# Altium PCB Sandshark 3D R1.1.PcbDoc (part 3 of 3)
Units mil, origin at the board's own origin, x right, y up, seen from the top; angles counter-clockwise.
Board outline 4143.89 x 2810.03 mil, 5 copper layers (Top Layer, Mid-Layer 1, Groun Plane, Power Plane, Bottom Layer), stack 75.73 mil thick; 280 components, 177 nets, 885 pads, 519 vias.
Unrouted connection lines stored in the file: 19.
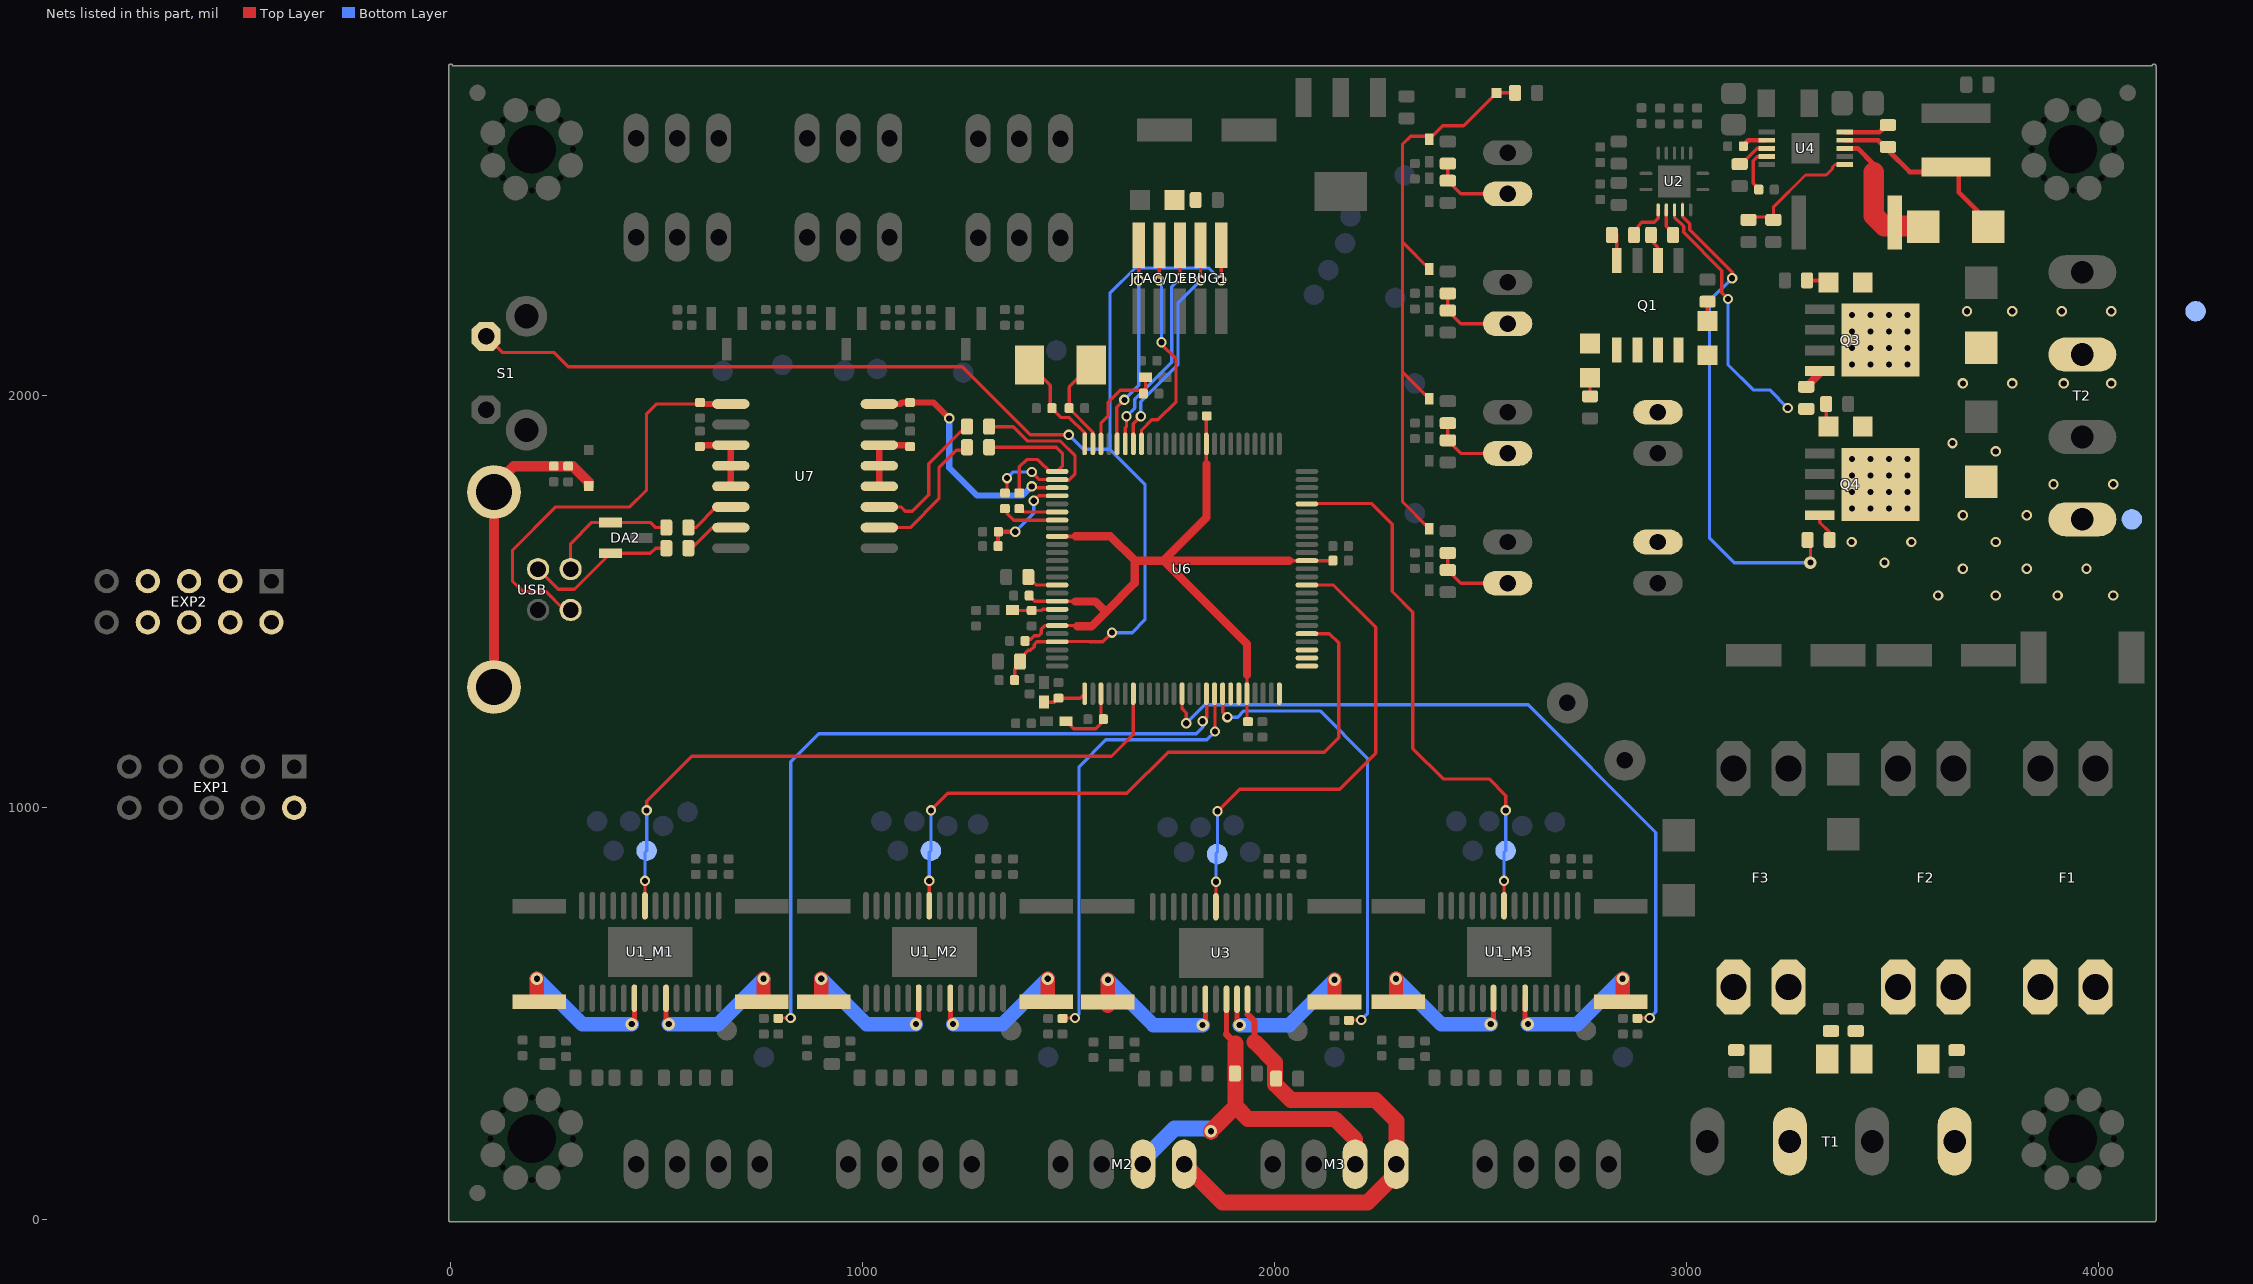
[diagram p5: the nets of this part, all layers, seen from the top]

## Via types
v1: diameter 25, hole 15, Top Layer to Bottom Layer, 288 vias
v2: diameter 30, hole 15, Top Layer to Bottom Layer, tented both sides, 72 vias
v3: diameter 19.68, hole 7.87, Top Layer to Bottom Layer, 64 vias
v4: diameter 25, hole 15, Top Layer to Bottom Layer, tented both sides, 51 vias
v5: diameter 30, hole 15, Top Layer to Bottom Layer, tented bottom, 32 vias
v6: diameter 30, hole 15, Top Layer to Bottom Layer, 10 vias
v7: diameter 50, hole 30, Top Layer to Bottom Layer, 2 vias

## Nets (pads, with @x,y where several pads share a name; then routed paths per layer and width w, separated by ;. In a path a pad name is that pad's centre, name@x,y a point inside that pad or via, vN(x,y) a via of type N, cw(c..) or ccw(c..) an arc to the next point about the centre after c; other vN are vias at no path point) (continued)
NetC23_1: C23.1 M2.1 M3.1 U3.10 | length 1276.3
  Top Layer w12: 1933.98,498.66 U3.10@1933.98,535.43
  Top Layer w15: 1933.98,498.66 1951,481.64 1951,431.64
  Top Layer w39: M2.1@1780,135 1873.5,41.5 2225,41.5 2295,111.5 M3.1@2295,135 2295,240 2244,291 2039,291 2001,329 2001,381.64 1951,431.64
NetC26_1: C26.1 M2.2 M3.2 U3.8 | length 946.9
  Top Layer w12: 1882.8,449.84 U3.8@1882.8,535.43
  Top Layer w18: 1882.8,449.84 1905,427.64
  Top Layer w39: v2(1845,215) 1905,275 ; 1905,427.64 1905,275 ; M3.2@2195,135 2195,195 2145,245 1935,245 1905,275
  Bottom Layer w39: M2.2@1680,135 1680,144.9 1756.6,221.5 1838.5,221.5 v2(1845,215)
NetC28_1: C28.1 U4.10 | length 93.7
  Top Layer w12: U4.10@3382.8,2639.8 3383.1,2639.5 3467.5,2639.5 C28.1@3473.77,2645.77
NetC28_2: C28.2 D15.C L1.1 U4.9 | length 475.6
  Top Layer w12: U4.9@3382.8,2620.11 3464.12,2620.11 3492,2592.23 3540.97,2543.26 3660,2543.26 3660,2493.74 D15.C@3742.74,2411
NetC32_1: C32.1 U4.4 | length 112
  Top Layer w8: C32.1@3176.3,2501 3161.52,2515.78 3161.52,2570.29 3171.97,2580.74 U4.4@3193.83,2580.74
NetC36_2: C36.2 U6.25 X1.1 | length 258.9
  Top Layer w8: X1.1@1405,2075 1455,2025 1455,1974 C36.2@1459,1970 1482,1947 1501.79,1947 1538.78,1910.01 U6.25@1538.78,1883.15
NetC37_2: C37.2 U6.24 X1.2 | length 237.9
  Top Layer w8: X1.2@1554.61,2075 1501,2021.39 C37.2@1501,1970 1501,1969 1558.46,1911.54 U6.24@1558.46,1883.15
NetC38_1: C38.1 R35.2 U6.29 | length 231.7
  Top Layer w8: v1(1415,1745) 1427.17,1757.17 U6.29@1471.85,1757.17
  Top Layer w10: C38.1@1328.7,1635 R35.2@1328.7,1669.7 ; R35.2@1329,1670 v1(1370,1670)
  Top Layer w15: R35.2@1328.7,1669.7 R35.2@1329,1670
  Bottom Layer w8: v1(1370,1670) 1415,1715 v1(1415,1745)
NetC40_2: C40.2 FB1.1 U6.53 | length 174.6
  Top Layer w8: FB1.1@1493.62,1210 1511.62,1192 1566,1192 1584,1210 1578.15,1215.85 U6.53@1578.15,1276.85
NetC42_2: C42.2 C43.2 C44.2 C45.2 C46.2 U6.10 U6.34 U6.42 U6.45 U6.71 U6.89 | length 2150.5
  Top Layer w8: C43.2@1394,1409 1407.79,1409 1416.62,1417.83 1427.83,1417.83 1433,1423 1433,1433 1442.2,1442.2 U6.45@1471.85,1442.2 1518.8,1442.2 1520.5,1440.5 ; C44.2@1404,1515 1417.74,1501.26 U6.42@1471.85,1501.26 1514.74,1501.26 ; 1834.5,1834.5 1834.06,1834.94 U6.10@1834.06,1883.15 1834.06,1950.06 C42.2@1835,1951 ; 1932.48,1322.48 U6.71@1932.48,1276.85 1932.48,1211.52 C45.2@1935,1209 ; 2035,1599.68 U6.89@2078.15,1599.68 C46.2@2141,1599.68
  Top Layer w10: U6.34@1471.85,1658.74 1516.26,1658.74
  Top Layer w12: 1660,1599.68 1660.32,1599.68 ; 1729.68,1599.68 1730.32,1599.68
  Top Layer w20: 1515.5,1500.5 1564.5,1500.5 1590,1475 ; 1516.26,1658.74 1601.26,1658.74 1660.32,1599.68 1729.68,1599.68 1834.5,1704.5 1834.5,1834.5 ; 1520.5,1440.5 1555.5,1440.5 1590,1475 ; 1660,1599.68 1660,1545 1590,1475 ; 1932.48,1322.48 1932.48,1397.52 1730.32,1599.68 2035,1599.68
NetC51_2: C51.2 FB2.1 U6.51 | length 107.3
  Top Layer w8: FB2.1@1440,1256.38 1465.38,1256.38 C51.2@1475,1266 1527.93,1266 U6.51@1538.78,1276.85
NetC54_2: C54.2 FB3.2 U6.43 | length 108.3
  Top Layer w8: FB3.2@1364.62,1479 C54.2@1410,1479 1434,1479 1436.57,1481.57 U6.43@1471.85,1481.57
NetC56_2: C56.2 FB4.2 U6.23 | length 254.6
  Top Layer w8: U6.23@1578.15,1883.15 1578.15,1933.15 1596,1951 1596,1980.77 1595.88,1980.88 1595.88,1984.12 1625.27,2013.5 1683.26,2013.5 C56.2@1686.38,2010.38 ; C56.2@1681,2005 C56.2@1686.38,2010.38 ; FB4.2@1686.38,2045 C56.2@1686.38,2010.38
NetC57_1: C57.1 U7.12 U7.13 U7.14 | length 176.4
  Top Layer w8: C57.1@1111.3,1880 C57.1@1115,1876.3
  Top Layer w15: U7.12@1040.12,1780 U7.13@1040.12,1830 U7.14@1040.12,1880 C57.1@1111.3,1880
NetC59_1: C59.1 U7.1 USB.1 | length 1015.3
  Top Layer w8: USB.1@276,1480 231,1525 175,1525 150,1550 150,1625 255,1730 435,1730 475,1770 475,1955 500,1980 C59.1@608.7,1980
  Top Layer w15: C59.1@608.7,1980 U7.1@679.88,1980
NetC60_1: C60.1 U7.3 U7.4 U7.5 | length 176.4
  Top Layer w8: C60.1@605,1876.3 C60.1@608.7,1880
  Top Layer w15: C60.1@608.7,1880 U7.3@679.88,1880 U7.4@679.88,1830 U7.5@679.88,1780
NetC61_2: C61.2 D22.A R42.2 USB.P$1 USB.P$2 | length 769.4
  Top Layer w25: USB.P$2@90,1293 105,1308 105,1781.22 152.78,1829 C61.2@250,1829 R42.2@285,1829 296,1829 335,1790 D22.A@335,1781
NetC67_1: C67.1 C69.1 FB5.1 FB6.1 T1.3
NetC68_1: C68.1 F2.1 FB5.2
NetC70_1: C70.1 F3.1 FB6.2
NetD5_A: D5.A R7.1 | length 41.9
  Top Layer w8: D5.A@3050,2186.34 R7.1@3050,2228.23
NetD5_C: D5.C FAN-1.2 Q1.7
NetD6_A: D6.A R10.1 | length 35.1
  Top Layer w8: R10.1@2765.01,1998.54 D6.A@2765,2033.66
NetD6_C: D6.C FAN-2.2 Q1.5
NetD7_A: D7.A D8.C Q3.5 T2.3 TP12.1
  other v1: 3670,2030 3790,2030 3915,2030 4030,2030 3680,2205 3790,2205 3910,2205 4030,2205
  other v5: 3400.88,2076.1 3445.88,2076.1 3490.88,2076.1 3535.88,2076.1 3400.88,2116.1 3445.88,2116.1 3490.88,2116.1 3535.88,2116.1 3400.88,2156.1 3445.88,2156.1 3490.88,2156.1 3535.88,2156.1 3400.88,2196.1 3445.88,2196.1 3490.88,2196.1 3535.88,2196.1
NetD8_A: D8.A R13.1 | length 46.9
  Top Layer w10: R13.1@3291.77,2280 D8.A@3338.67,2280
NetD9_A: D9.A R16.1 | length 57.3
  Top Layer w8: R16.1@3338.23,1980 3338.23,1930.43 D9.A@3343.66,1925
NetD9_C: D9.C D10.A Q4.5 T2.1 TP14.1
  other v1: 3610,1515 3750,1515 3900,1515 4035,1515 3670,1580 3825,1580 3970,1580 3480,1595 3400,1645 3545,1645 3750,1645 3670,1710 3825,1710 3890,1785 4035,1785 3750,1865 3645,1885
  other v5: 3400.88,1726.1 3445.88,1726.1 3490.88,1726.1 3535.88,1726.1 3400.88,1766.1 3445.88,1766.1 3490.88,1766.1 3535.88,1766.1 3400.88,1806.1 3445.88,1806.1 3490.88,1806.1 3535.88,1806.1 3400.88,1846.1 3445.88,1846.1 3490.88,1846.1 3535.88,1846.1
NetD15_A: D15.A R26.2 U4.8 | length 341.9
  Top Layer w12: U4.8@3382.8,2600.43 3414.67,2600.43 3453.88,2561.22 3453.88,2542
  Top Layer w50: 3453.88,2542 3453.88,2437.26 3479.14,2412 3494.14,2412 D15.A@3574,2412
NetD18_C: D18.C D23_U_TR1.C D23_U_TR2.C D23_U_TR3.C D23_U_TR4.C R29.1 | length 1470.8
  Top Layer w8: 2311.28,2056.28 D23_U_TR4.C@2375,1992.56 ; 2311.28,2371.28 D23_U_TR2.C@2375,2307.56 ; D23_U_TR3.C@2375,1677.56 2310,1742.56 2310,2610 2330,2630 2367.56,2630 D23_U_TR1.C@2375,2622.56 2407.44,2655 2458.31,2655 D18.C@2538.31,2735 R29.1@2583.23,2735
NetF1_1: F1.1 T1.1
NetLED1_A: LED1.A R30.1
NetP2_U_TR1_1: P2_U_TR1.1 R43_U_TR1.1 R44_U_TR1.2 | length 199.6
  Top Layer w8: R44_U_TR1.2@2420,2563.23 R43_U_TR1.1@2420,2521.77 2451.77,2490 P2_U_TR1.1@2565,2490
NetP2_U_TR2_1: P2_U_TR2.1 R43_U_TR2.1 R44_U_TR2.2 | length 186.4
  Top Layer w8: R44_U_TR2.2@2420,2235 R43_U_TR2.1@2420,2206.77 2451.77,2175 P2_U_TR2.1@2565,2175
NetP2_U_TR3_1: P2_U_TR3.1 R43_U_TR3.1 R44_U_TR3.2 | length 199.6
  Top Layer w8: R44_U_TR3.2@2420,1618.23 R43_U_TR3.1@2420,1576.77 2451.77,1545 P2_U_TR3.1@2565,1545
NetP2_U_TR4_1: P2_U_TR4.1 R43_U_TR4.1 R44_U_TR4.2 | length 199.6
  Top Layer w8: R44_U_TR4.2@2420,1933.23 R43_U_TR4.1@2420,1891.77 2451.77,1860 P2_U_TR4.1@2565,1860
NetQ1_2: Q1.2 R8.2 | length 71.6
  Top Layer w8: R8.2@2918.23,2395 2918.23,2371.77 2930,2360 Q1.2@2930,2328.27
NetQ1_4: Q1.4 R11.2 | length 65
  Top Layer w8: Q1.4@2830,2328.27 R11.2@2830,2393.22
NetQ3_4: Q3.4 R14.2 | length 51.7
  Top Layer w20: R14.2@3290,2021.77 3322.64,2054.42 Q3.4@3322.64,2060
NetQ4_4: Q4.4 R17.2 | length 70
  Top Layer w8: Q4.4@3322.64,1710 3322.64,1692.36 3346.77,1668.23 R17.2@3346.77,1650
NetR5_M1_2: R5_M1.2 U1_M1.9 | length 397.2
  Top Layer w12: U1_M1.9@522.64,537.8 522.64,481.61 v2(529.25,475)
  Top Layer w35: R5_M1.2@759.25,528.86 v2(759.25,585)
  Bottom Layer w35: v2(529.25,475) 649.25,475 v2(759.25,585)
NetR5_M2_2: R5_M2.2 U1_M2.9 | length 397.2
  Top Layer w12: U1_M2.9@1212.64,537.8 1212.64,481.61 v2(1219.25,475)
  Top Layer w35: R5_M2.2@1449.25,528.86 v2(1449.25,585)
  Bottom Layer w35: v2(1219.25,475) 1339.25,475 v2(1449.25,585)
NetR5_M3_2: R5_M3.2 U1_M3.9 | length 397.2
  Top Layer w12: U1_M3.9@2607.64,537.8 2607.64,481.61 v2(2614.25,475)
  Top Layer w35: R5_M3.2@2844.25,528.86 v2(2844.25,585)
  Bottom Layer w35: v2(2614.25,475) 2734.25,475 v2(2844.25,585)
NetR6_M1_2: R6_M1.2 U1_M1.6 | length 397.2
  Top Layer w12: v2(439.25,475) 445.87,481.61 U1_M1.6@445.87,537.8
  Top Layer w35: R6_M1.2@209.25,528.86 v2(209.25,585)
  Bottom Layer w35: v2(209.25,585) 319.25,475 v2(439.25,475)
NetR6_M2_2: R6_M2.2 U1_M2.6 | length 397.2
  Top Layer w12: v2(1129.25,475) 1135.87,481.61 U1_M2.6@1135.87,537.8
  Top Layer w35: R6_M2.2@899.25,528.86 v2(899.25,585)
  Bottom Layer w35: v2(899.25,585) 1009.25,475 v2(1129.25,475)
NetR6_M3_2: R6_M3.2 U1_M3.6 | length 397.2
  Top Layer w12: v2(2524.25,475) 2530.87,481.61 U1_M3.6@2530.87,537.8
  Top Layer w35: R6_M3.2@2294.25,528.86 v2(2294.25,585)
  Bottom Layer w35: v2(2294.25,585) 2404.25,475 v2(2524.25,475)
NetR8_1: R8.1 U2.12 | length 62.9
  Top Layer w8: U2.12@2950.32,2451.1 2950.32,2411.45 R8.1@2966.77,2395
NetR11_1: R11.1 U2.13 | length 93.9
  Top Layer w8: R11.1@2881.77,2395 2881.77,2411.77 2890.68,2420.68 2920.68,2420.68 2930.63,2430.63 U2.13@2930.63,2451.1
NetR14_1: R14.1 U2.11 | length 618.4
  Top Layer w8: U2.11@2970,2451.1 2970,2433.16 2992.34,2410.82 2992.34,2396.45 3085,2303.79 3085,2250 v1(3100,2235)
  Bottom Layer w8: v1(3100,2235) 3100,2075.03 3161.03,2014 3201,2014 v1(3245,1970)
NetR17_1: R17.1 U2.10 | length 1211.4
  Top Layer w8: U2.10@2989.69,2466.1 2989.69,2434.69 3007.34,2417.04 3007.34,2402.66 3110,2300 v4(3110,2285) ; R17.1@3293.23,1650 3300,1643.23 v2(3300,1595)
  Bottom Layer w8: v4(3110,2285) 3055,2230 3055,1655 3115,1595 v2(3300,1595)
NetR21_2: R21.2 U3.9 | length 388.7
  Top Layer w12: U3.9@1908.39,535.43 1908.39,479.25 v2(1915,472.64)
  Top Layer w35: R21.2@2145,535 v2(2145,582.64)
  Bottom Layer w35: v2(1915,472.64) 2035,472.64 v2(2145,582.64)
NetR22_2: R22.2 U3.6 | length 404.1
  Top Layer w12: v2(1825,472.64) 1831.61,479.25 U3.6@1831.61,535.43
  Top Layer w35: R22.2@1595,519.69 v2(1595,582.64)
  Bottom Layer w35: v2(1595,582.64) 1705,472.64 v2(1825,472.64)
NetR23_1: R23.1 U4.2 | length 56.9
  Top Layer w12: R23.1@3140.68,2611.05 3149.73,2620.11 U4.2@3193.83,2620.11
NetR25_1: R25.1 U4.3 | length 69.1
  Top Layer w8: R25.1@3138.14,2568.14 3170.43,2600.43 U4.3@3193.83,2600.43
NetR27_2: R27.2 R28.1 U4.6 | length 290.4
  Top Layer w7: R28.1@3146.36,2433.6 R27.2@3202.45,2433.6 ; R27.2@3210,2441.15 3210,2457.67 3287.89,2535.56 3338.25,2535.56 3353.18,2550.49 3353.18,2554.18 3360.06,2561.06 U4.6@3382.8,2561.06
NetR31_2: R31.2 U6.31 | length 92.8
  Top Layer w8: R31.2@1380,1720 1390,1720 1392.2,1717.8 U6.31@1471.85,1717.8
NetR32_2: R32.2 U6.32 | length 139.8
  Top Layer w8: R32.2@1350,1726 1350,1715 1366.89,1698.11 U6.32@1471.85,1698.11
NetR34_2: R34.2 U6.40 | length 78.1
  Top Layer w8: R34.2@1401.77,1560 1421.15,1540.63 U6.40@1471.85,1540.63
R_N: DA2.1 R38.2 USB.2 | length 317.7
  Top Layer w8: USB.2@291,1579.21 291,1641 342.4,1692.4 DA2.1@387.6,1692.4 484.88,1692.4 497.28,1680 R38.2@520.47,1680
R_P: DA2.2 R40.2 USB.3 | length 370.6
  Top Layer w8: USB.3@212,1579.21 261.21,1530 300.48,1530 DA2.2@387.6,1617.12 ; DA2.2@387.6,1617.6 484.88,1617.6 497.28,1630 R40.2@520.47,1630
  Top Layer w15: DA2.2@387.6,1617.12 DA2.2@387.6,1617.6
REF1: R4_M1.1 U6.66 | length 1771.7
  Top Layer w8: R4_M1.1@796.1,490 v4(825,490) ; v1(1825,1210) 1835,1220 1835,1275.91 U6.66@1834.06,1276.85
  Bottom Layer w8: v4(825,490) 825,1112.01 892.99,1180 1810,1180 1825,1195 v1(1825,1210)
REF2: R4_M2.1 U6.67 | length 1100.6
  Top Layer w8: R4_M2.1@1486.1,490 v4(1515,490) ; U6.67@1853.74,1276.85 1855,1275.59 v1(1855,1185)
  Bottom Layer w8: v4(1515,490) 1525,500 1525,1100 1590,1165 1835,1165 v1(1855,1185)
REF3: R4_M3.1 U6.63 | length 1849.7
  Top Layer w8: U6.63@1775,1276.85 1775,1240 1785,1230 v1(1785,1205) ; R4_M3.1@2880,488.9 2881.1,490 v4(2910,490)
  Bottom Layer w8: v1(1785,1205) 1830,1250 2615,1250 2925,940 2925,505 v4(2910,490)
REF_Z: R20.1 U6.68 | length 1127.2
  Top Layer w8: U6.68@1873.43,1276.85 1873.43,1231.57 v1(1885,1220) ; R20.1@2180,483.9 2181.1,485 v4(2210,485)
  Bottom Layer w8: v1(1885,1220) 1910,1220 1925,1235 2110,1235 2225,1120 2225,500 v4(2210,485)
RESET: C62.1 EXP2.8 JTAG/DEBUG1.10 R41.1 S1.1 U6.47 | length 3241
  Top Layer w8: S1.1@86,2144 125,2105 250,2105 285,2070 1241.21,2070 1406.21,1905 v1(1500,1905) ; C62.1@1368.7,1310 1368.7,1336.93 1386.77,1355 1386.77,1366.77 1402,1382 1406.98,1382 1416,1391.02 1416,1396 1422.83,1402.83 U6.47@1471.85,1402.83 1472.52,1403.5 1549.73,1403.5 1550.4,1402.83 1582.83,1402.83 v1(1605,1425) ; v1(1870,2280) JTAG/DEBUG1.10@1870,2354.92
  Bottom Layer w8: v1(1500,1905) 1535,1870 1600,1870 ; v1(1605,1425) 1653.79,1425 1685,1456.21 1685,1785 1600,1870 ; v1(1870,2280) 1840,2310 1661.21,2310 1600,2248.79 1600,1870
RTRY_ENC1: EXP1.2
RTRY_ENC2: EXP2.3
RTRY_ENC3: EXP2.5
RX2: U6.69
SD_DETECT: EXP2.7
SPI0_CS0: EXP2.4 U6.76
SPI0_MISO: U6.75
SPI0_MOSI: EXP2.6 U6.78
SPI0_SCLK: EXP2.2 U6.77
STEP1: TP9_M1.1 U1_M1.22 U6.57 | length 1589.1
  Top Layer w8: U1_M1.22@471.46,762.2 v1(471.46,822.64) ; v1(475.51,993.74) 475.51,1015.51 585,1125 1603.79,1125 1656.89,1178.1 U6.57@1656.89,1276.85
  Bottom Layer w8: v1@471.25,822.84 v1(471.46,822.64) TP9_M1.1@471.46,891.75 ; TP9_M1.1@475.48,895.77 v1@475.48,985.77
STEP2: TP9_M2.1 U1_M2.22 U6.80 | length 1598.7
  Top Layer w8: U1_M2.22@1161.46,762.2 v1(1161.46,822.64) ; v1(1165.51,993.74) 1206.77,1035 1641.21,1035 1741.21,1135 2120,1135 2155,1170 2155,1400.29 2132.77,1422.52 U6.80@2078.15,1422.52
  Bottom Layer w8: v1@1161.25,822.84 v1(1161.46,822.64) TP9_M2.1@1161.46,891.75 ; TP9_M2.1@1165.48,895.77 v1@1165.48,985.77
STEP3: TP9_M3.1 U1_M3.22 U6.96 | length 1321.4
  Top Layer w8: U6.96@2078.15,1737.48 2079.17,1738.5 2234.07,1738.5 2285,1687.57 2285,1524.85 2335,1474.85 2335,1143.64 2408.64,1070 2520,1070 2560.51,1029.49 v1(2560.51,993.74) ; U1_M3.22@2556.46,762.2 v1(2556.46,822.64)
  Bottom Layer w8: v1@2556.25,822.84 v1(2556.46,822.64) TP9_M3.1@2556.46,891.75 ; TP9_M3.1@2560.48,895.77 v1@2560.48,985.77
STEP_Z: TP22.1 U3.22 U6.86 | length 1176.5
  Top Layer w8: U3.22@1857.2,759.84 v1(1857.2,820.28) ; v1(1861.26,991.38) 1914.88,1045 2157.28,1045 2245,1132.72 2245,1437.57 2141.94,1540.63 U6.86@2078.15,1540.63
  Bottom Layer w8: v1@1857,820.48 v1(1857.2,820.28) TP22.1@1857.2,889.39 ; TP22.1@1861.23,893.41 v1@1861.23,983.41
TCK/SWDCLK: JTAG/DEBUG1.4 U6.18 | length 540.3
  Top Layer w8: U6.18@1676.57,1883.15 1676.57,1916.57 1701.5,1941.5 1716.5,1941.5 1760.37,1985.37 1760.37,2089.63 1725,2125 v1(1725,2130) ; v1(1720,2280) 1720,2334.92 1710,2344.92 JTAG/DEBUG1.4@1720,2354.92
  Bottom Layer w8: v1(1720,2280) 1725,2275 v1(1725,2130)
TDI: JTAG/DEBUG1.8 U6.19 | length 539.3
  Top Layer w8: U6.19@1656.89,1883.15 1656.89,1931.89 v1(1675,1950) ; v1(1820,2280) JTAG/DEBUG1.8@1820,2354.92
  Bottom Layer w8: v1(1675,1950) 1675,1985 1765,2075 1765,2225 v1(1820,2280)
TDO/SWO: JTAG/DEBUG1.6 U6.20 | length 526.8
  Top Layer w8: U6.20@1637.2,1883.15 1637.2,1922.2 1639.98,1924.98 v1(1639.98,1950) ; v1(1770,2285) JTAG/DEBUG1.6@1770,2354.92
  Bottom Layer w8: v1(1639.98,1950) 1660,1970.02 1660,1991.21 1750,2081.21 1750,2265 v1(1770,2285)
TMS/SWDIO: JTAG/DEBUG1.2 U6.21 | length 494.4
  Top Layer w8: U6.21@1617.52,1883.15 1616.48,1884.18 1616.48,1971.48 v1(1635,1990) ; v1(1670,2280) JTAG/DEBUG1.2@1670,2354.92
  Bottom Layer w8: v1(1635,1990) 1670,2025 v1(1670,2280)
TX2: U6.70
UD_N: R38.1 U7.6 | length 123.8
  Top Layer w8: R38.1@576.77,1680 595,1680 645,1730 U7.6@679.88,1730
UD_P: R40.1 U7.7 | length 123.8
  Top Layer w8: R40.1@576.77,1630 585,1630 635,1680 U7.7@679.88,1680
UI_N: R39.2 U7.11 | length 346.3
  Top Layer w8: U7.11@1040.12,1730 1092.89,1730 1102.89,1720 1120,1720 1160,1760 1160,1835.36 1167.32,1842.68 1242.14,1917.5 1245.73,1917.5 R39.2@1253.23,1925
UI_P: R37.2 U7.10 | length 338
  Top Layer w8: U7.10@1040.12,1680 1115.36,1680 1185,1749.64 1185,1825 1227.5,1867.5 1245.73,1867.5 R37.2@1253.23,1875
UMCU_N: R32.1 R39.1 U6.27 | length 501.9
  Top Layer w8: R39.1@1306.77,1925 1365,1925 1399.99,1890 1480,1890 1515,1855 1515,1810 1500,1795 U6.27@1473.39,1795 ; R32.1@1350,1763.9 v1(1350,1800) ; v1(1410,1815) 1428.46,1796.54 U6.27@1471.85,1796.54
  Bottom Layer w8: v1(1350,1800) 1365,1815 v1(1410,1815)
UMCU_P: R31.1 R37.1 U6.26 | length 397.3
  Top Layer w8: R37.1@1306.77,1875 1469.55,1875 1485,1859.54 1485,1830.09 U6.26@1471.85,1816.94 ; R31.1@1380,1773.9 1380,1805 1380,1827.43 1397.57,1845 1425,1845 1430,1840 1453.78,1816.22 U6.26@1471.85,1816.22
VBUS: C58.1 U6.28 U7.16 | length 607.9
  Top Layer w8: v4@1413.15,1776.85 U6.28@1471.85,1776.85
  Top Layer w15: U7.16@1040.12,1980 1091.3,1980 1095,1983.7 C58.1@1115,1983.7 1171.3,1983.7 v1(1210,1945) ; v4(1410,1780) v4@1413.15,1776.85
  Bottom Layer w15: v1(1210,1945) 1210,1825 1277.5,1757.5 1387.5,1757.5 v4(1410,1780)
pads on no net: EXP2.1 FD1.1 FD2.1 FD3.1 H1.0 H2.0 H3.0 H4.0 JTAG/DEBUG1.7 U1_M1.18 U1_M1.19 U1_M1.23 U1_M1.27 U1_M2.18 U1_M2.19 U1_M2.23 U1_M2.27 U1_M3.18 U1_M3.19 U1_M3.23 U1_M3.27 U2.6 U2.8 U2.9 U3.18 U3.19 U3.23 U3.27 U6.13 U6.14 U6.15 U6.16 U6.30 U6.36 U6.37 U6.38 U6.39 U6.46 U6.48 U6.74 U6.79 U6.95 U6.98 U6.100

## Polygon pours and split planes (outlines as drawn)
GND on Top Layer "Bottom Layer-No Net" (solid, remove dead copper, pour order 91): 2100,2790 2100,2450 2300,2450 2300,2605 2345,2650 2350,2655 2350,2690 2295,2690 2295,2670 2225,2670 2215,2670 2215,2680 2215,2790
GND on Top Layer "Bottom Layer-No Net" (solid, remove dead copper, pour order 89): 3225,2665 3350,2665 3350,2535 3340,2545 3225,2545
GND on Top Layer "Top Layer-No Net" (solid, remove dead copper, pour order 82): 3217.98,2021.5 3277.98,2021.5 3277.98,2081.5 3362.98,2081.5 3362.98,2231.5 3282.98,2231.5 3277.98,2236.5 3277.97,2255 3150,2255 3150,2021.5
GND on Top Layer "Top Layer-No Net" (solid, remove dead copper, pour order 81): 3272.97,1635 3272.98,1731.5 3277.98,1731.5 3362.98,1731.5 3362.98,1881.5 3282.98,1881.5 3277.98,1886.5 3277.97,1940 3150,1940 3150,1635
NetD9_C on Top Layer "Bottom Layer-No Net" (solid, remove dead copper, pour order 43): 4135,1500 3775,1500 3575,1500 3500,1575 3375,1575 3375,1900 3400,1900 3400,1950 3450,1950 3450,1900 3575,1900 3750,1900 3850,1800 4135,1800
+12VCC3 on Top Layer "Bottom Layer-No Net" (solid, remove dead copper, pour order 44): 3375,2000 3375,1965 3460,1965 3460,1910 3525,1910 3755,1910 3855,1810 4130,1810 4130,2000
NetD7_A on Top Layer "Bottom Layer-No Net" (solid, remove dead copper, pour order 45): 3375,2250 3375,2010 4125,2010 4125,2225 3600,2225 3575,2250 3455,2250 3455,2300 3405,2300 3400,2300 3400,2250
GND on Top Layer "SMPS" (solid, pour order 76): 3411,2549 3383,2521 3295,2521 3245,2471 3245,2348 3370,2348 3419,2397 3421,2399 3421,2532 3421,2549
NetC28_2 on Top Layer "SMPS" (solid, pour order 74): 3425,2615 3447.77,2592.23 3492,2592.23 3598.23,2486 3614,2486 3630,2470 3630,2394 3668,2356 3754,2356 3772,2374 3772,2456 3772,2569 3726,2615 3715,2626 3443,2626 3428,2626 3425,2623
NetD15_A on Top Layer "SMPS" (solid, pour order 72): 3428,2582 3428,2446 3428,2397 3477,2348 3590,2348 3614,2372 3614,2461 3602,2473 3585,2473 3504,2554 3477,2581 3431,2581
+12VCC2 on Top Layer "Bottom Layer-No Net" (solid, remove dead copper, pour order 48): 4125,2235 4125,2425 3825,2425 3760,2360 3755,2355 3715,2315 3670,2315 3670,2235
NetD6_C on Top Layer "Bottom Layer-No Net" (solid, remove dead copper, pour order 54): 2900,2150 2740,2150 2740,2085 2740,2080 2800,2080 2800,1800 2800,1745 2820,1725 2820,1595 3020,1595 3020,1705 2970,1705 2855,1820 2855,1840 2855,2070 2900,2070
NetD5_C on Top Layer "Bottom Layer-No Net" (solid, remove dead copper, pour order 56): 2910,2150 3080,2150 3080,1905 2865,1905 2865,2060 2910,2060
NetF1_1 on Top Layer "Bottom Layer-No Net" (solid, remove dead copper, pour order 47): 3550,340 3550,190 3550,-5 3940,-5 4136.54,-5 4139.42,-5 4140,-5 4140,-1.54 4140,825 3750,825 3750,450 3685,450 3685,340
NetC67_1 on Top Layer "Bottom Layer-No Net" (solid, remove dead copper, pour order 49): 3150,-5 3150,340 3260,340 3255,345 3255,475 3505,475 3505,300 3420,300 3380,260 3380,-5
NetC70_1 on Top Layer "Bottom Layer-No Net" (solid, remove dead copper, pour order 51): 3150,350 3245,350 3240,355 3240,485 3325,485 3320,490 3320,825 3045,825 3040,820 3040,435 3040,390 3150,390
NetC68_1 on Top Layer "Bottom Layer-No Net" (solid, remove dead copper, pour order 52): 3625,350 3625,385 3680,385 3680,460 3740,460 3740,825 3440,825 3440,485 3515,485 3515,350
+12VCC3 on Top Layer "Bottom Layer-No Net" (solid, remove dead copper, pour order 53): 3748.62,835 4138.62,835 4138.62,1215 3940,1215 3940,1490 3623.62,1490 3623.62,1230 3748.62,1230
+12VCC2 on Top Layer "Bottom Layer-No Net" (solid, remove dead copper, pour order 55): 3740,835 3740,1220 3450,1220 3450,1565 3280,1565 3280,1445 3280,1225 3325,1225 3325,1010 3445,1010 3445,835
GND on Top Layer "Bottom Layer-No Net" (solid, remove dead copper, pour order 57): 3430,1000 3325,1000 3325,485 3435,485 3435,1000
GND on Top Layer "Bottom Layer-No Net" (solid, remove dead copper, pour order 58): 2925,825 3030,825 3030,380 3140,380 3140,10 2925,10
+12VCC1 on Top Layer "Bottom Layer-No Net" (solid, remove dead copper, pour order 59): 3310,835 3310,1215 3150,1215 2775,1215 2775,975 2915,835 2975,835
GND on Top Layer "Bottom Layer-No Net" (solid, remove dead copper, pour order 67): 145,800 325,800 325,715 635,715 675,715 675,800 825,800 825,550 670,550 670,500 650,500 648.97,559.01 650.3,573.2 650,585 285,585 285,550 145,550
GND on Top Layer "Bottom Layer-No Net" (solid, remove dead copper, pour order 66): 835,800 1015,800 1015,715 1325,715 1365,715 1365,800 1515,800 1515,550 1360,550 1360,500 1340,500 1338.97,559.01 1340.3,573.2 1340,585 975,585 975,550 835,550
GND on Top Layer "Bottom Layer-No Net" (solid, remove dead copper, pour order 65): 1530.75,797.64 1710.75,797.64 1710.75,712.64 2020.75,712.64 2060.75,712.64 2060.75,797.64 2210.75,797.64 2210.75,547.64 2055.75,547.64 2055.75,497.64 2035.75,497.64 2034.72,556.64 2036.05,570.84 2035.75,582.64 1670.75,582.64 1670.75,547.64 1530.75,547.64
GND on Top Layer "Bottom Layer-No Net" (solid, remove dead copper, pour order 64): 2230,800 2410,800 2410,715 2720,715 2760,715 2760,800 2910,800 2910,550 2755,550 2755,500 2735,500 2733.97,559.01 2735.3,573.2 2735,585 2370,585 2370,550 2230,550
GND on Top Layer "Bottom Layer-No Net" (solid, remove dead copper, pour order 75): 4125,1225 3950,1225 3950,1490 4125,1490
GND on Top Layer "Bottom Layer-No Net" (solid, remove dead copper, pour order 77): 2805,2160 2805,2285 2855,2285 2855,2360 2905,2360 2905,2285 2955,2285 2955,2360 3005,2360 3005,2160
3.3VCC on Top Layer "Bottom Layer-No Net" (solid, remove dead copper, pour order 78): 1865,2800 1865,2500 1865,2495 1845,2495 1845,2450 2085,2450 2090,2445 2090,2685 2090,2800
GND on Top Layer "Bottom Layer-No Net" (solid, remove dead copper, pour order 79): 3390,10 3390,255 3425,290 3540,290 3540,240 3540,10
GND on Top Layer "Bottom Layer-No Net" (solid, remove dead copper, pour order 84): 1305,2180 1305,1925 1625,1925 1650,1950 1650,2180
GND on Bottom Layer "Bottom Layer-No Net" (solid, remove dead copper, pour order 63): 145,505 145,1100 190,1100 825,1100 825,995 825,400 745,400 145,400
GND on Bottom Layer "Bottom Layer-No Net" (solid, remove dead copper, pour order 62): 835,505 835,1100 880,1100 1515,1100 1515,995 1515,400 1435,400 835,400
GND on Bottom Layer "Bottom Layer-No Net" (solid, remove dead copper, pour order 61): 1530.75,502.64 1530.75,1097.64 1575.75,1097.64 2210.75,1097.64 2210.75,992.64 2210.75,397.64 2130.75,397.64 1530.75,397.64
GND on Bottom Layer "Bottom Layer-No Net" (solid, remove dead copper, pour order 60): 2230,505 2230,1100 2275,1100 2910,1100 2910,995 2910,400 2830,400 2230,400
INPUT_GND on Bottom Layer "Bottom Layer-No Net" (solid, remove dead copper, pour order 68): 0,1175 270,1175 365,1270 365,1545 395,1575 800,1575 860,1635 860,1975 820,2015 395,2015 380,2000 375,1995 375,1910 345,1880 0,1880
NetD9_C on Bottom Layer "Bottom Layer-No Net" (solid, remove dead copper, pour order 69): 4125,1500 4125,1800 3850,1800 3750,1900 3730,1900 3375,1900 3375,1575 3500,1575 3580,1495 3585,1500 3895,1500
NetD7_A on Bottom Layer "Bottom Layer-No Net" (solid, remove dead copper, pour order 70): 4125,2010 4125,2225 3600,2225 3575,2250 3455,2250 3375,2250 3375,2010
+12VCC3 on Bottom Layer "Bottom Layer-No Net" (solid, remove dead copper, pour order 71): 4125,1810 4125,2000 3460,2000 3460,1910 3575,1910 3755,1910 3855,1810 4125,1810
GND on Bottom Layer "Bottom Layer-No Net" (solid, remove dead copper, pour order 73): 2785,2305 3695,2305 3790,2400 3795,2405 3795,2790 2785,2790
GND on Bottom Layer "Bottom Layer-No Net" (solid, remove dead copper, pour order 80): 2300,1425 2775,1425 2775,2708.5 2301.5,2708.5 2300,2710
GND on Bottom Layer "Bottom Layer-No Net" (solid, remove dead copper, pour order 81): 350,2790 350,2075 1620,2075 1625,2080 1625,2785
+12VCC3 on Bottom Layer "Bottom Layer-No Net" (solid, remove dead copper, pour order 82): 3750,835 4125,835 4125,1215 3940,1215 3940,1490 3625,1490 3625,1230 3750,1230
+12VCC2 on Bottom Layer "Bottom Layer-No Net" (solid, remove dead copper, pour order 83): 3280,1565 3280,1225 3325,1225 3325,1010 3445,1010 3445,835 3740,835 3740,1220 3450,1220 3450,1565
+12VCC3 on Power Plane (split plane): 4118.78,850.1 3755.1,850.1 3755.1,2004.9 4118.78,2004.9
+5VCC on Power Plane (split plane): 4118.78,2430.1 3805,2430.1 3803.05,2429.71 3801.4,2428.6 3721.4,2348.6 3687.89,2315.1 3147.11,2315.1 3070.1,2392.11 3070.1,2485 3070.1,2780.2 4118.78,2780.2
3.3VCC on Power Plane (split plane): 4118.78,15.08 3325.1,15.08 3325.1,839.9 4118.78,839.9
+12VCC2 on Power Plane (split plane): 4118.78,2015.1 3750,2015.1 3748.05,2014.71 3746.4,2013.6 3745.29,2011.95 3744.9,2010 3744.9,850.1 3325.1,850.1 3325.1,1215 3324.71,1216.95 3323.6,1218.6 3321.95,1219.71 3320,1220.1 3077.11,1220.1 2725.1,1572.11 2725.1,2339.9 3107.89,2339.9 3141.4,2306.4 3143.05,2305.29 3145,2304.9 3690,2304.9 3691.95,2305.29 3693.6,2306.4 3728.6,2341.4 3807.11,2419.9 4118.78,2419.9
3.3VCC on Power Plane (split plane): 3059.9,2485 3059.9,2390 3060.29,2388.05 3061.4,2386.4 3097.69,2350.1 2720,2350.1 2718.05,2349.71 2716.4,2348.6 2715.29,2346.95 2714.9,2345 2714.9,1570 2715.29,1568.05 2716.4,1566.4 3062.69,1220.1 2775,1220.1 2773.05,1219.71 2771.4,1218.6 2770.29,1216.95 2769.9,1215 2769.9,970 2769.9,655.1 15.08,655.1 15.08,2780.2 3059.9,2780.2
+12VCC1 on Power Plane (split plane): 3314.9,15.08 15.08,15.08 15.08,644.9 2775,644.9 2776.95,645.29 2778.6,646.4 2779.71,648.05 2780.1,650 2780.1,970 2780.1,1209.9 3314.9,1209.9
INPUT_GND on Groun Plane (split plane): 854.9,1972.89 854.9,1637.11 797.89,1580.1 395,1580.1 393.05,1579.71 391.4,1578.6 361.4,1548.6 360.29,1546.95 359.9,1545 359.9,1180.1 15.08,1180.1 15.08,1874.9 345,1874.9 346.95,1875.29 348.6,1876.4 378.6,1906.4 379.71,1908.05 380.1,1910 380.1,1992.89 397.11,2009.9 817.89,2009.9
FGND on Groun Plane (split plane): 4118.78,15.08 15.08,15.08 15.08,1169.9 94.9,1169.9 94.9,375 95.29,373.05 96.4,371.4 98.05,370.29 100,369.9 369.9,369.9 369.9,65 370.29,63.05 371.4,61.4 373.05,60.29 375,59.9 3750,59.9 3751.95,60.29 3753.6,61.4 3754.71,63.05 3755.1,65 3755.1,369.9 4065,369.9 4066.95,370.29 4068.6,371.4 4069.71,373.05 4070.1,375 4070.1,2400 4069.71,2401.95 4068.6,2403.6 4066.95,2404.71 4065,2405.1 3755.1,2405.1 3755.1,2700 3754.71,2701.95 3753.6,2703.6 3751.95,2704.71 3750,2705.1 400,2705.1 398.05,2704.71 396.4,2703.6 395.29,2701.95 394.9,2700 394.9,2405.1 100,2405.1 98.05,2404.71 96.4,2403.6 95.29,2401.95 94.9,2400 94.9,2045.1 15.08,2045.1 15.08,2780.2 4118.78,2780.2
GND on Groun Plane (split plane): 3744.9,2400 3745.29,2398.05 3746.4,2396.4 3748.05,2395.29 3750,2394.9 4059.9,2394.9 4059.9,380.1 3750,380.1 3748.05,379.71 3746.4,378.6 3745.29,376.95 3744.9,375 3744.9,70.1 380.1,70.1 380.1,375 379.71,376.95 378.6,378.6 376.95,379.71 375,380.1 105.1,380.1 105.1,1169.9 365,1169.9 366.95,1170.29 368.6,1171.4 369.71,1173.05 370.1,1175 370.1,1542.89 397.11,1569.9 800,1569.9 801.95,1570.29 803.6,1571.4 863.6,1631.4 864.71,1633.05 865.1,1635 865.1,1975 864.71,1976.95 863.6,1978.6 823.6,2018.6 821.95,2019.71 820,2020.1 395,2020.1 393.05,2019.71 391.4,2018.6 371.4,1998.6 370.29,1996.95 369.9,1995 369.9,1912.11 342.89,1885.1 15.08,1885.1 15.08,2034.9 100,2034.9 101.95,2035.29 103.6,2036.4 104.71,2038.05 105.1,2040 105.1,2394.9 400,2394.9 401.95,2395.29 403.6,2396.4 404.71,2398.05 405.1,2400 405.1,2694.9 3744.9,2694.9

## Keep-outs
Keep-Out Layer:
  lines w10: 10,10 10,2790 4125,2790 4125,10 10,10

## Other copper
Groun Plane (plane layer: these items are gaps in the copper):
  lines w10: 0,2040 100,2040 100,2400 400,2400 400,2700 3690,2700 3750,2700 3750,2400 4065,2400 4065,375 3750,375 3750,65 375,65 375,375 100,375 100,1175 ; 5,1880 345,1880 375,1910 375,1995 395,2015 820,2015 860,1975 860,1635 800,1575 395,1575 365,1545 365,1175 10,1175
Power Plane (plane layer: these items are gaps in the copper):
  lines w10: 5,650 2775,650 2775,970 2775,1215 3320,1215 3320,10 ; 3065,2800 3065,2485 3065,2390 3145,2310 3690,2310 3725,2345 3805,2425 4125,2425 ; 3075,1215 2720,1570 2720,2345 2937.5,2345 3110,2345 ; 3320,845 4120,845 ; 3750,845 3750,2010 4133.87,2010

## Silkscreen, mask and mechanical layers (free items; w line width, h text height)
Top Overlay:
  circle w5: c4055,375 r42
  rectangle: 10,375 140,1200
  text "TR-0" at 2725,2680 h60 r270
  text "MIN" at 1645,2500 h90 r90
  text "TR-1" at 2725,2310 h60 r270
  text "HEAT-0" at 3595,2305 h100 r270
  text "MAX" at 1645,2270 h90 r90
  text "FAN-0" at 3090,2045 h100 r270
  text "HEATBED" at 3585,1975 h100 r270
  text "TR-2" at 2730,1875 h60 r270
  text "FAN-1" at 3090,1680 h100 r270
  text "TR-4" at 2725,1555 h60 r270
  text "HEATERS" at 3760,1510 h100
  text "E" at 2470,885 h150
  text "Z" at 1810,880 h150
  text "X" at 460,875 h150
  text "Y" at 1140,865 h150
  text "HEAT 5A" at 3435,620 h85 r90
  text "MOTORS" at 3035,440 h85 r90
  text "HEATBED 15A" at 3780,440 h85 r90
  text "PWR" at 2925,345 h100
  text "U" at 4034,343 h60
  text "E" at 2825,260 h150
  text "X" at 755,255 h150
  text "Z" at 2295,255 h150
  text "Y" at 1280,235 h150
Mechanical 15:
  lines w10: 0,0 0,2800 4133.86,2800 4133.86,0 0,0

## Text inside footprints (layer, text, board x,y; h text height)
C66: Top Overlay "+" at 3011.06,998.48 h77.5 r135; Top Overlay "+" at 2949.82,1059.73 h77.5 r135
FAN-1: Mechanical 16 "1" at 2992.5,1797.5 h62 r90
FAN-2: Mechanical 16 "1" at 2992.5,1482.5 h62 r90
MAX1_ES1: Mechanical 16 "1" at 387.5,2322.5 h62
MAX1_ES2: Mechanical 16 "1" at 802.5,2322.5 h62
MAX1_ES3: Mechanical 16 "1" at 1217.5,2321.5 h62
MIN1_ES1: Mechanical 16 "1" at 712.5,2687.5 h62 r180
MIN1_ES2: Mechanical 16 "1" at 1127.5,2687.5 h62 r180
MIN1_ES3: Mechanical 16 "1" at 1542.5,2686.5 h62 r180
P2_U_TR1: Mechanical 16 "1" at 2627.5,2427.5 h62 r90
P2_U_TR2: Mechanical 16 "1" at 2627.5,2112.5 h62 r90
P2_U_TR3: Mechanical 16 "1" at 2627.5,1482.5 h62 r90
P2_U_TR4: Mechanical 16 "1" at 2627.5,1797.5 h62 r90
T1: Top Overlay "4" at 3150,275 h77.5 r180; Top Overlay "3" at 3350,275 h77.5 r180; Top Overlay "2" at 3550,275 h77.5 r180; Top Overlay "1" at 3735,275 h77.5 r180
T2: Top Overlay "3" at 4045,2000 h77.5 r90; Top Overlay "2" at 4045,1800 h77.5 r90; Top Overlay "1" at 4045,1615 h77.5 r90